# EAGLE board CDi450RGB (EAGLE 9.6.2)
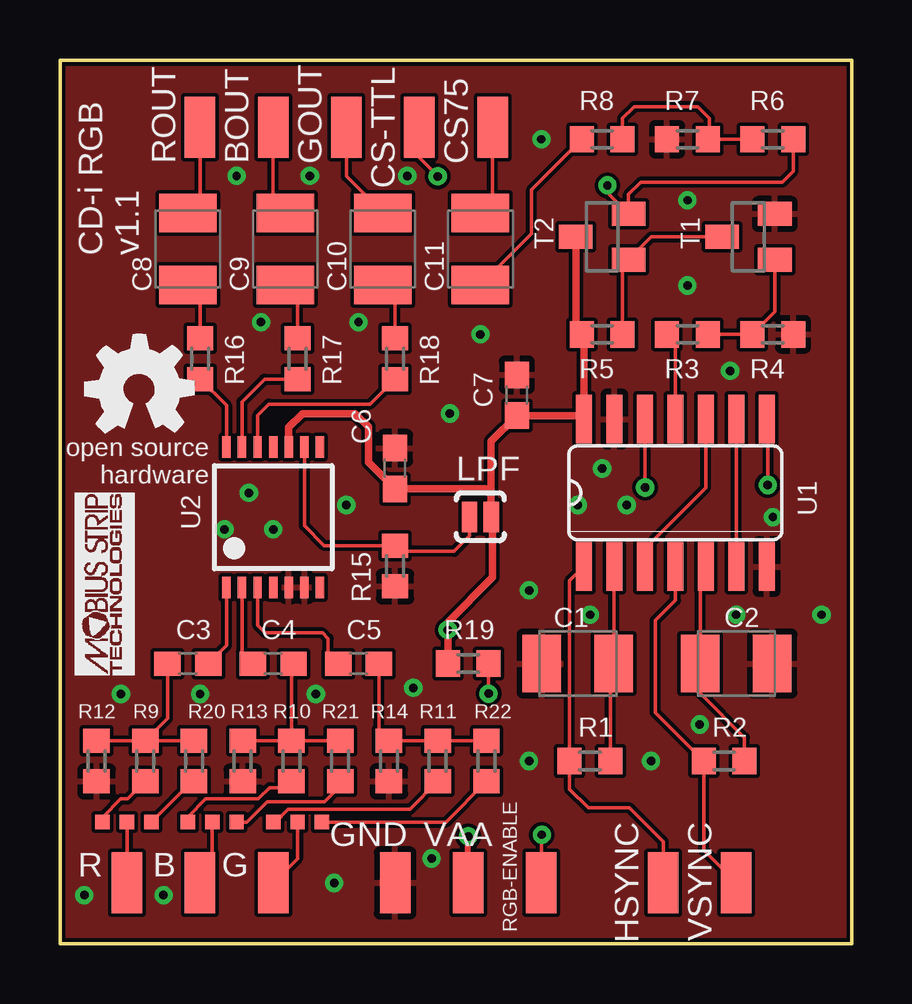
[diagram p0: board, top side]
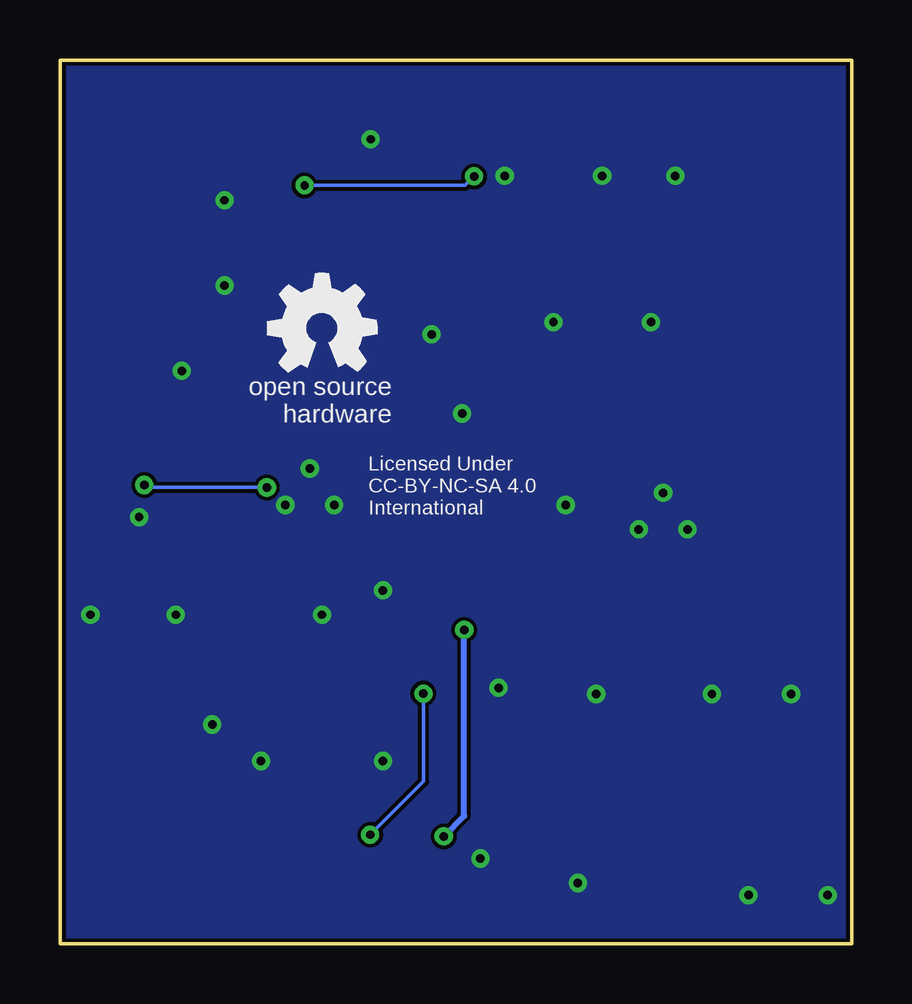
[diagram p1: board, bottom side, seen from below]

Size 33.02 x 36.83 mm. Coordinates in mm from the lower left corner, seen from the top.
Outline: 0,0 0,36.83 33.02,36.83 33.02,0 0,0
Copper layers (1*16): Top 0.035mm / dielectric 1.5mm / Bottom 0.035mm
Design rules "default *": minimum track width 6mil, minimum drill 0.35mm, track to track 6mil, track to pad 6mil, pad to pad 6mil, via to via 6mil, smd to smd 6mil, copper to edge 6mil, drill to drill 6mil, minimum pad ring 10mil, minimum via ring 8mil, stop-mask expansion 4mil, vias tented up to drill 30mil, thermal gap 10mil

## Footprints (pad centres in the part's own frame; a part is rotated, then mirrored left to right if it is on the bottom)
SMD1,27-2,54 = smd 1.27 x 2.54: 1 0,0
SMC_B = smd 1.6 x 2.4: + -1.5,0; - 1.5,0
C0603 = smd 1.1 x 1: 1 -0.85,0; 2 0.85,0
TESTPAD_TP06SQ = smd 0.6 x 0.6: TP 0,0
SJ_2S-NO = smd 0.635 x 1.27: 1 -0.45,0; 2 0.45,0
R0603 = smd 1 x 1.1: 1 -0.85,0; 2 0.85,0
SOT23 = smd 1 x 1.4: 1 -0.95,-1.1; 2 0.95,-1.1; 3 0,1.1
SO14 = smd 0.66 x 2.032: 1 -3.81,-3.073; 2 -2.54,-3.073; 3 -1.27,-3.073; 4 0,-3.073; 5 1.27,-3.073; 6 2.54,-3.073; 7 3.81,-3.073; 8 3.81,3.073; 9 2.54,3.073; 10 1.27,3.073; 11 0,3.073; 12 -1.27,3.073; 13 -2.54,3.073; 14 -3.81,3.073
TSSOP14 = smd 0.35 x 0.9: 1 -1.95,-2.925; 2 -1.3,-2.925; 3 -0.65,-2.925; 4 0,-2.925; 5 0.65,-2.925; 6 1.3,-2.925; 7 1.95,-2.925; 8 1.95,2.925; 9 1.3,2.925; 10 0.65,2.925; 11 0,2.925; 12 -0.65,2.925; 13 -1.3,2.925; 14 -1.95,2.925

## Placement (x,y rotation side)
B  [SMD1,27-2,54]  5.84,2.54 0 top
BOUT  [SMD1,27-2,54]  8.89,34.04 180 top
C1  22uf  [SMC_B]  21.59,11.68 180 top
C2  22uf  [SMC_B]  28.19,11.68 0 top
C3  0.1uf  [C0603]  5.33,11.68 180 top
C4  0.1uf  [C0603]  8.89,11.68 0 top
C5  0.1uf  [C0603]  12.45,11.68 0 top
C6  0.1uf  [C0603]  13.97,19.81 90 top
C7  0.1uf  [C0603]  19.05,22.86 90 top
C8  220uf  [SMC_B]  5.33,28.96 90 top
C9  220uf  [SMC_B]  9.4,28.96 90 top
C10  220uf  [SMC_B]  13.46,28.96 90 top
C11  220uf  [SMC_B]  17.53,28.96 90 top
CS75  [SMD1,27-2,54]  18.03,34.04 0 top
CS-TTL  [SMD1,27-2,54]  14.99,34.04 0 top
E$1  [TEST]  3.53,10.94 90 top
E$2  [OSHW_5MM]  22.1,25.65 0 bottom
E$3  [TESTPAD_TP06SQ]  1.78,5.08 0 top
E$4  [TESTPAD_TP06SQ]  2.79,5.08 0 top
E$5  [TESTPAD_TP06SQ]  3.81,5.08 0 top
E$6  [TESTPAD_TP06SQ]  5.33,5.08 0 top
E$7  [TESTPAD_TP06SQ]  6.35,5.08 0 top
E$8  [TESTPAD_TP06SQ]  7.37,5.08 0 top
E$9  [TESTPAD_TP06SQ]  8.89,5.08 0 top
E$10  [TESTPAD_TP06SQ]  9.91,5.08 0 top
E$11  [TESTPAD_TP06SQ]  10.92,5.08 0 top
E$12  [OSHW_5MM]  3.3,23.11 0 top
G  [SMD1,27-2,54]  8.89,2.54 0 top
GND  [SMD1,27-2,54]  13.97,2.54 0 top
GOUT  [SMD1,27-2,54]  11.94,34.04 180 top
HSYNC  [SMD1,27-2,54]  25.15,2.54 180 top
LPF  [SJ_2S-NO]  17.53,17.8 180 top
R  [SMD1,27-2,54]  2.79,2.54 0 top
R1  2.2kohm  [R0603]  22.1,7.62 0 top
R2  2.2kohm  [R0603]  27.69,7.62 0 top
R3  1.8kohm  [R0603]  26.16,25.4 0 top
R4  1.8kohm  [R0603]  29.72,25.4 0 top
R5  2.7kohm  [R0603]  22.61,25.4 180 top
R6  150ohm  [R0603]  29.72,33.53 180 top
R7  47ohm  [R0603]  26.16,33.53 180 top
R8  75ohm  [R0603]  22.61,33.53 180 top
R9  9.1kohm  [R0603]  3.56,7.62 90 top
R10  9.1kohm  [R0603]  9.65,7.62 90 top
R11  9.1kohm  [R0603]  15.75,7.62 90 top
R12  2.2kohm  [R0603]  1.52,7.62 90 top
R13  2.2kohm  [R0603]  7.62,7.62 90 top
R14  2.2kohm  [R0603]  13.72,7.62 90 top
R15  4.7kohm  [R0603]  13.97,15.75 270 top
R16  75ohm  [R0603]  5.84,24.38 90 top
R17  75ohm  [R0603]  9.91,24.38 90 top
R18  75ohm  [R0603]  13.97,24.38 90 top
R19  1kohm  [R0603]  17.02,11.68 180 top
R20  5.6kohm  [R0603]  5.59,7.62 90 top
R21  5.6kohm  [R0603]  11.68,7.62 90 top
R22  5.6kohm  [R0603]  17.78,7.62 90 top
RGB-ENABLE  [SMD1,27-2,54]  20.07,2.54 180 top
ROUT  [SMD1,27-2,54]  5.84,34.04 0 top
T1  2n3904  [SOT23]  28.7,29.46 90 top
T2  2n3904  [SOT23]  22.61,29.46 90 top
U1  74ls86  [SO14]  25.65,18.8 0 top
U2  [TSSOP14]  8.89,17.78 0 top
VAA  [SMD1,27-2,54]  17.02,2.54 0 top
VSYNC  [SMD1,27-2,54]  28.19,2.54 180 top

## Library data of the parts
B BOUT CS75 CS-TTL G GND GOUT HSYNC R RGB-ENABLE ROUT VAA VSYNC = wirepad
C1 C2 C8-C11 = rcl
C3-C7 R1-R22 T1 T2 = adafruit
E$1 E$2 E$12 = oshw
E$3-E$11 = BeagleBone_Blue_R3
LPF = SparkFun-Retired
U1 = 74xx-us
U2 = 74xx-eu

## Nets
GND: C1.- C2.- C6.2 C7.2 GND.1 R4.2 R7.2 R12.1 R13.1 R14.1 R15.2 T1.2 U1.7 U1.13 U2.5 U2.6
S$1: C11.- CS75.1
S$2: E$4.TP R.1
S$3: HSYNC.1 R1.1 U1.1
S$4: C1.+ R1.2 U1.2
S$5: R5.1 T1.3 T2.1
S$6: R2.1 U1.4 VSYNC.1
S$7: C2.+ R2.2 U1.5
S$8: U1.3 U1.10
S$9: U1.6 U1.9
S$10: U1.8 U1.12
S$11: R3.1 U1.11
S$12: CS-TTL.1 R6.1 T2.2
S$13: R3.2 R4.1 T1.1
S$14: R6.2 R7.1 R8.1
S$15: C11.+ R8.2
S$16: B.1 E$7.TP
S$17: E$10.TP G.1
S$18: E$5.TP R20.1
S$19: C3.2 R9.2 R12.2 R20.2
S$20: C4.2 R10.2 R13.2 R21.2
S$21: C5.2 R11.2 R14.2 R22.2
S$22: C5.1 U2.3
S$23: C4.1 U2.2
S$24: C3.1 U2.1
S$25: R16.1 U2.14
S$26: R17.1 U2.13
S$27: R18.1 U2.12
S$28: C8.+ R16.2
S$29: C9.+ R17.2
S$30: C10.+ R18.2
S$31: C8.- ROUT.1
S$32: BOUT.1 C9.-
S$33: C10.- GOUT.1
S$34: LPF.2 R15.1 U2.9
S$35: R19.1 RGB-ENABLE.1
S$36: E$3.TP R9.1
S$37: E$8.TP R21.1
S$38: E$6.TP R10.1
S$39: E$11.TP R22.1
S$40: E$9.TP R11.1
VAA: C6.1 C7.1 LPF.1 R5.2 R19.2 T2.3 U1.14 U2.10 VAA.1

## Tracks (layer width: path | path; a pad name or v marks a point on that pad's centre or on a via)
GND  (via drill 0.35)
  other vias: 11.94,18.29 7.87,18.8 6.86,17.27 8.89,17.27 19.56,14.73 11.43,2.54 22.61,19.81 21.59,18.29 23.62,18.29 24.64,7.62 26.16,27.43 12.45,25.91 8.38,25.91 7.37,32 10.41,32 14.48,32 26.16,30.99 17.53,25.4 5.84,10.41 10.67,10.41 14.73,10.67 19.56,7.62 2.54,10.41 15.49,3.56 1.02,2.03 4.32,2.03 16.26,22.1 20.07,33.53 27.94,23.88 29.72,17.78 28.19,13.72 31.75,13.72 26.67,9.14 22.1,13.72
  pour Top: 0,36.83 0,0 33.02,0 33.02,36.83
  pour Bottom: 0,36.83 0,0 33.02,0 33.02,36.83
S$1
  Top 0.152: C11.- 18.03,30.96 CS75.1
S$2
  Top 0.152: E$4.TP R.1
S$3
  Top 0.152: U1.1 21.25,15.13 R1.1 21.25,6.44 22.02,5.67 23.75,5.67 25.15,4.26 HSYNC.1
S$4
  Top 0.152: R1.2 22.95,11.54 C1.+ 23.09,15.7 U1.2
S$5
  Top 0.152: R5.1 23.46,28.26 T2.1 24.66,29.46 T1.3
S$6
  Top 0.152: VSYNC.1 26.84,3.9 R2.1 24.81,9.64 24.81,13.48 25.66,14.32 U1.4
S$7
  Top 0.152: U1.5 26.69,15.49 C2.+ 26.69,10.44 28.54,8.6 R2.2
S$8
  Top 0.152: U1.3 24.38,16.47 26.92,19.01 U1.10
S$9
  Top 0.152: U1.6 U1.9
S$10  (via drill 0.35)
  Top 0.152: U1.12 24.38,19.03 v24.4,19.02 | U1.8 29.51,21.83 v29.51,19.12
  Bottom 0.152: v29.51,19.12 29.4,19.02 v24.4,19.02
S$11
  Top 0.152: U1.11 25.65,25.06 R3.1
S$12  (via drill 0.35)
  Top 0.152: R6.1 30.57,32.2 30.11,31.75 24.22,31.75 23.71,31.23 T2.2 22.82,31.3 v22.82,31.61 | CS-TTL.1 14.99,32.75 v15.75,31.98
  Bottom 0.152: v22.82,31.61 16.13,31.61 v15.75,31.98
S$13
  Top 0.152: T1.1 29.8,26.33 R4.1 R3.2
S$14
  Top 0.152: R6.2 R7.1 27.08,33.6 27.08,34.4 26.59,34.89 23.94,34.89 23.46,34.4 R8.1
S$15
  Top 0.152: R8.2 19.66,31.43 19.66,29.59 C11.+
S$16
  Top 0.152: E$7.TP 6.35,3.05 B.1
S$17
  Top 0.152: E$10.TP 9.91,3.56 G.1
S$18
  Top 0.152: E$5.TP 5.5,6.77 R20.1
S$19
  Top 0.152: R12.2 R9.2 | R9.2 4.48,9.4 C3.2 | R9.2 R20.2
S$20
  Top 0.152: R13.2 R10.2 | C4.2 9.65,11.6 R10.2 | R10.2 R21.2
S$21
  Top 0.152: C5.2 13.3,8.89 R14.2 R11.2 R22.2
S$22
  Top 0.152: C5.1 11.19,12.09 11.19,12.72 10.94,12.96 8.55,12.96 8.24,13.28 U2.3
S$23
  Top 0.152: C4.1 7.59,12.13 U2.2
S$24
  Top 0.152: C3.1 6.94,12.44 U2.1
S$25
  Top 0.152: R16.1 6.94,22.44 U2.14
S$26
  Top 0.152: U2.13 7.59,22.6 8.53,23.53 R17.1
S$27
  Top 0.152: U2.12 8.24,22.03 8.7,22.49 12.92,22.49 R18.1
S$28
  Top 0.152: C8.+ 5.84,26.95 R16.2
S$29
  Top 0.152: R17.2 9.91,26.95 C9.+
S$30
  Top 0.152: R18.2 13.97,26.95 C10.+
S$31
  Top 0.152: C8.- 5.84,30.96 ROUT.1
S$32
  Top 0.152: C9.- 8.89,30.96 BOUT.1
S$33
  Top 0.152: C10.- 11.94,31.98 GOUT.1
S$34
  Top 0.152: U2.9 10.19,17.42 11.01,16.6 R15.1 14.21,16.36 16.43,16.36 17.08,17 LPF.2
S$35  (via drill 0.35)
  Top 0.152: v17.87,10.43 R19.1 | RGB-ENABLE.1 20.07,4.53 v20.09,4.55
  Bottom 0.152: v20.09,4.55 17.86,6.78 v17.86,10.42 v17.87,10.43
S$36
  Top 0.152: R9.1 2.83,6.04 2.54,6.04 1.78,5.28 E$3.TP
S$37
  Top 0.152: E$8.TP 7.79,5.08 8.63,5.92 11.04,5.92 11.68,6.57 R21.1
S$38
  Top 0.152: R10.1 9.4,6.52 8.74,6.52 8.27,6.04 6.08,6.04 5.33,5.3 E$6.TP
S$39
  Top 0.152: E$11.TP 16.09,5.08 R22.1
S$40
  Top 0.152: E$9.TP 8.98,5.08 9.51,5.61 14.59,5.61 R11.1
VAA  (via drill 0.35)
  Top 0.254: VAA.1 v17.02,4.48
  Top 0.305: R19.2 v16.17,13.08 16.17,13.41 18.04,15.28 18.04,17.33 18.04,17.34 LPF.1 17.98,18.72 | T2.3 21.51,25.65 R5.2 21.84,25.31 U1.14 21.7,22.01 C7.1 17.98,20.94 17.98,18.72 | U2.10 9.54,21.52 10.11,22.1 12.31,22.1 12.86,21.54 12.86,20.07 C6.1 17.73,18.96 17.98,18.72
  Bottom 0.254: v17.02,4.48 16.17,5.33 v16.17,13.08

## Text on the board
tNames: CD-i RGB / v1.1
bNames: Licensed Under / CC-BY-NC-SA 4.0 / International